# Altium PCB KAI.PcbDoc
Units mm, origin at the board's own origin, x right, y up, seen from the top; angles counter-clockwise.
Board outline 150 x 150 mm, 4 copper layers (DIGITAL, GROUND, POWER, ANALOG), stack 0.778 mm thick; 87 components, 81 nets, 475 pads, 14 vias.
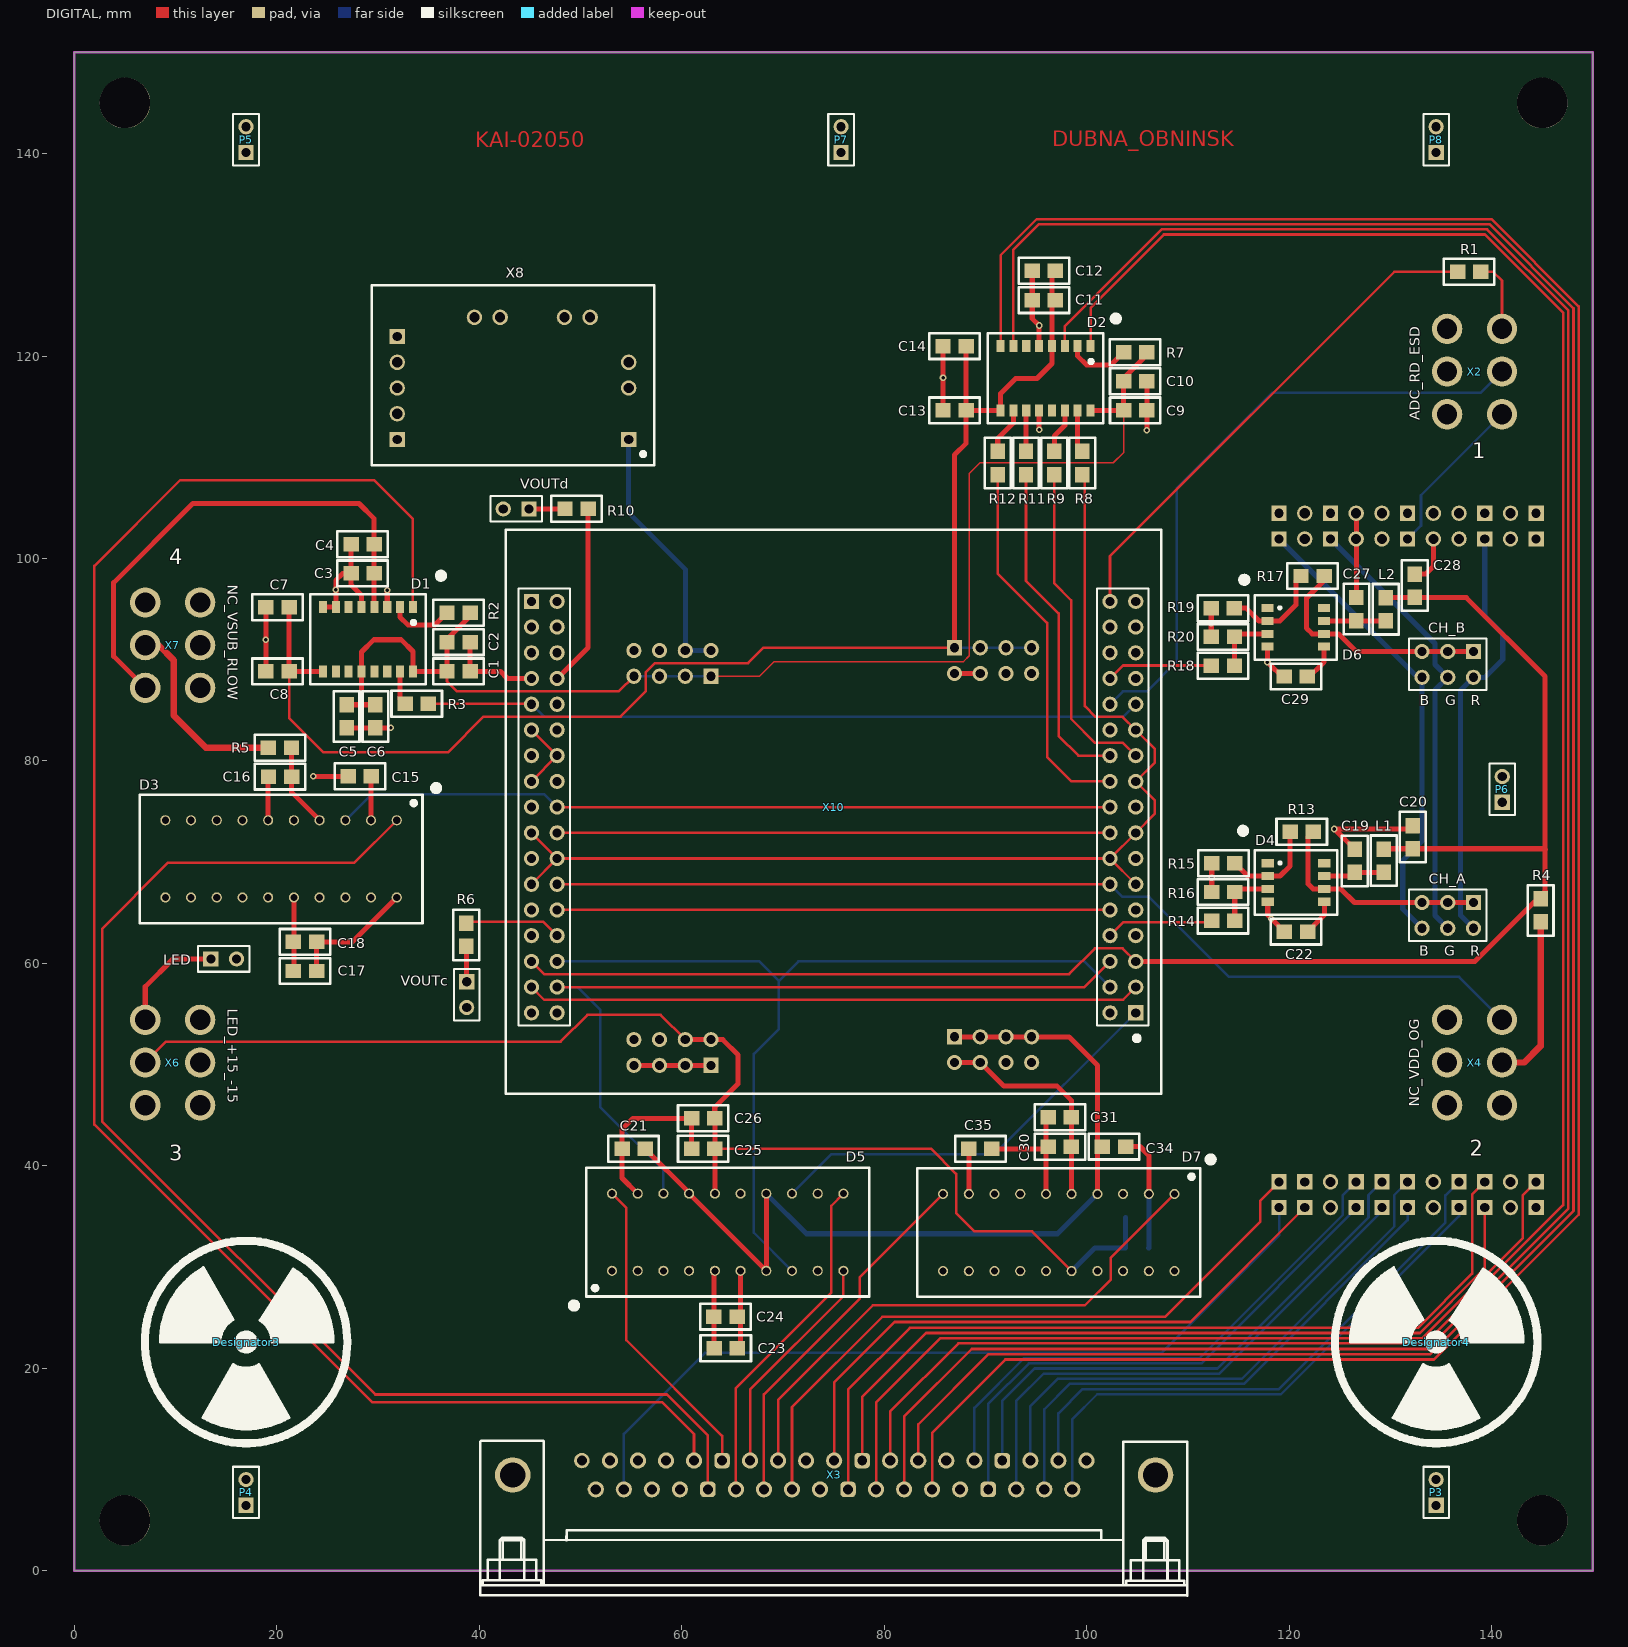
[diagram p0: DIGITAL view]
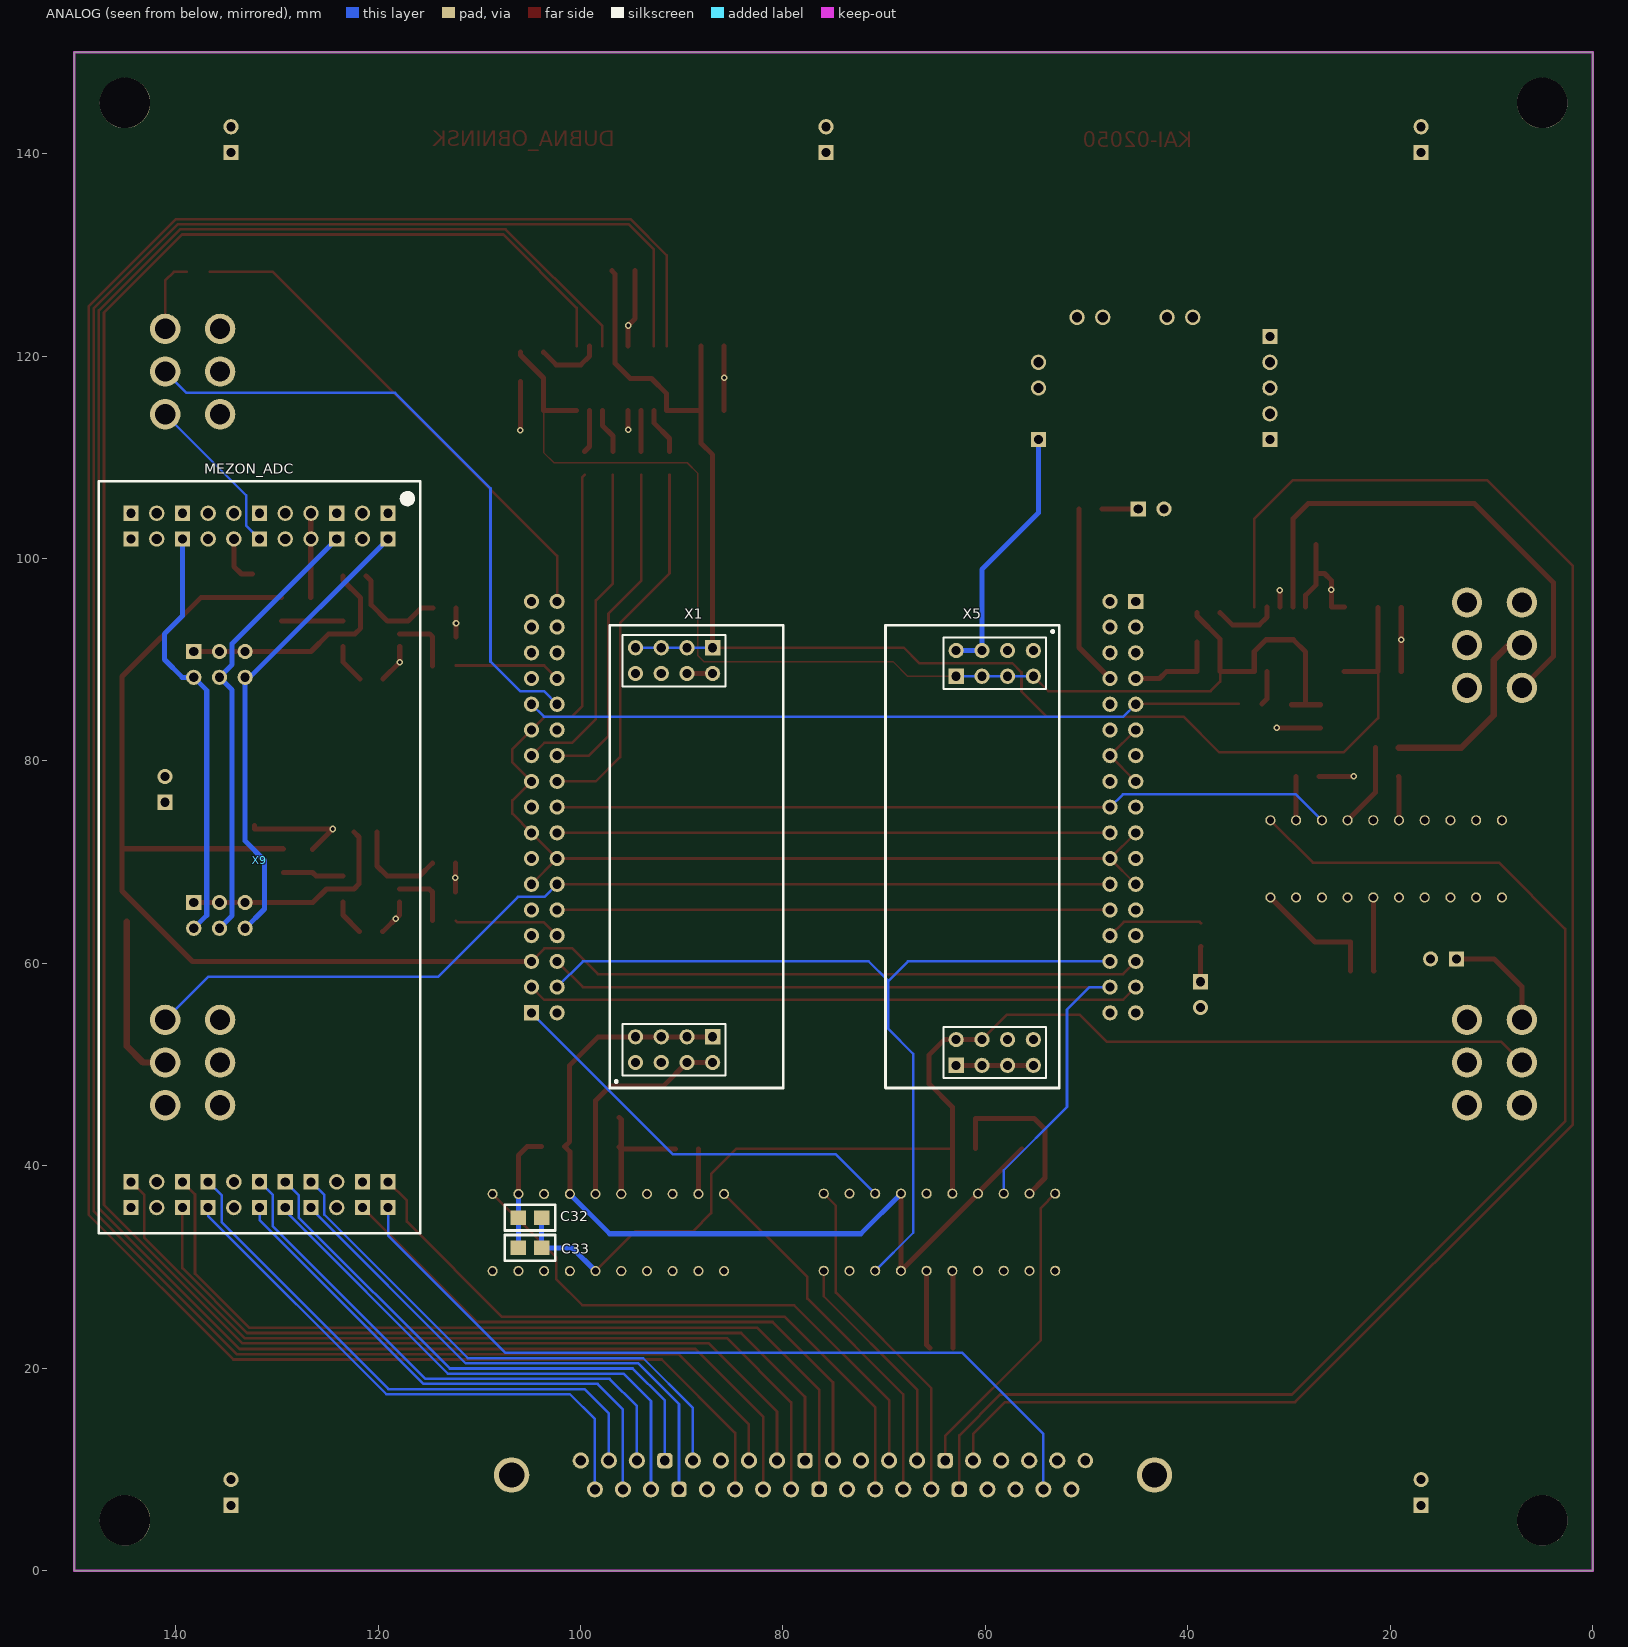
[diagram p1: ANALOG view, seen from below]
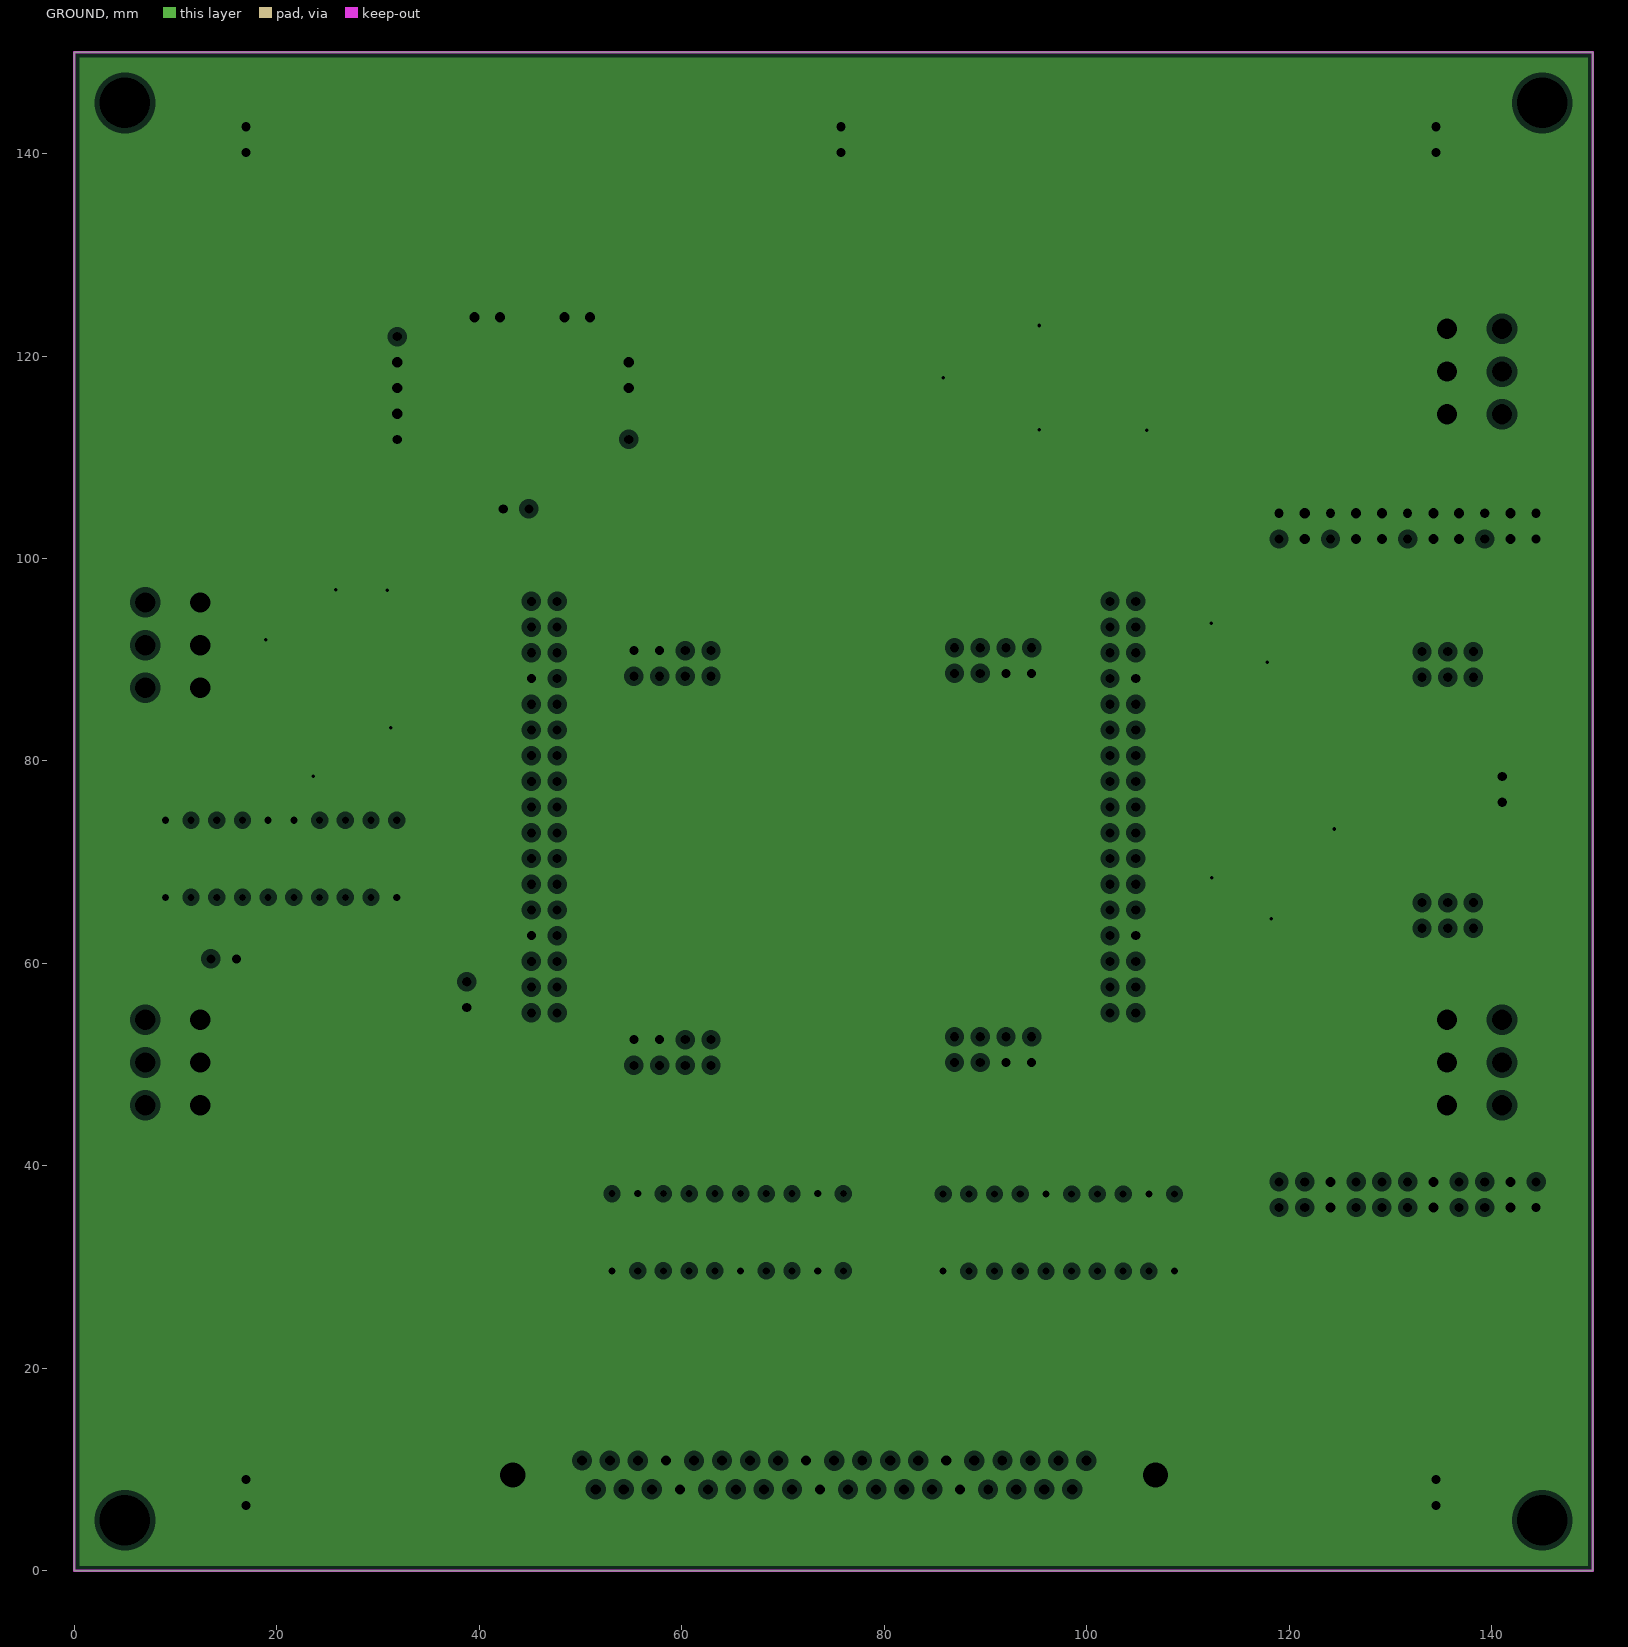
[diagram p2: GROUND, clearances drawn from the general rule]
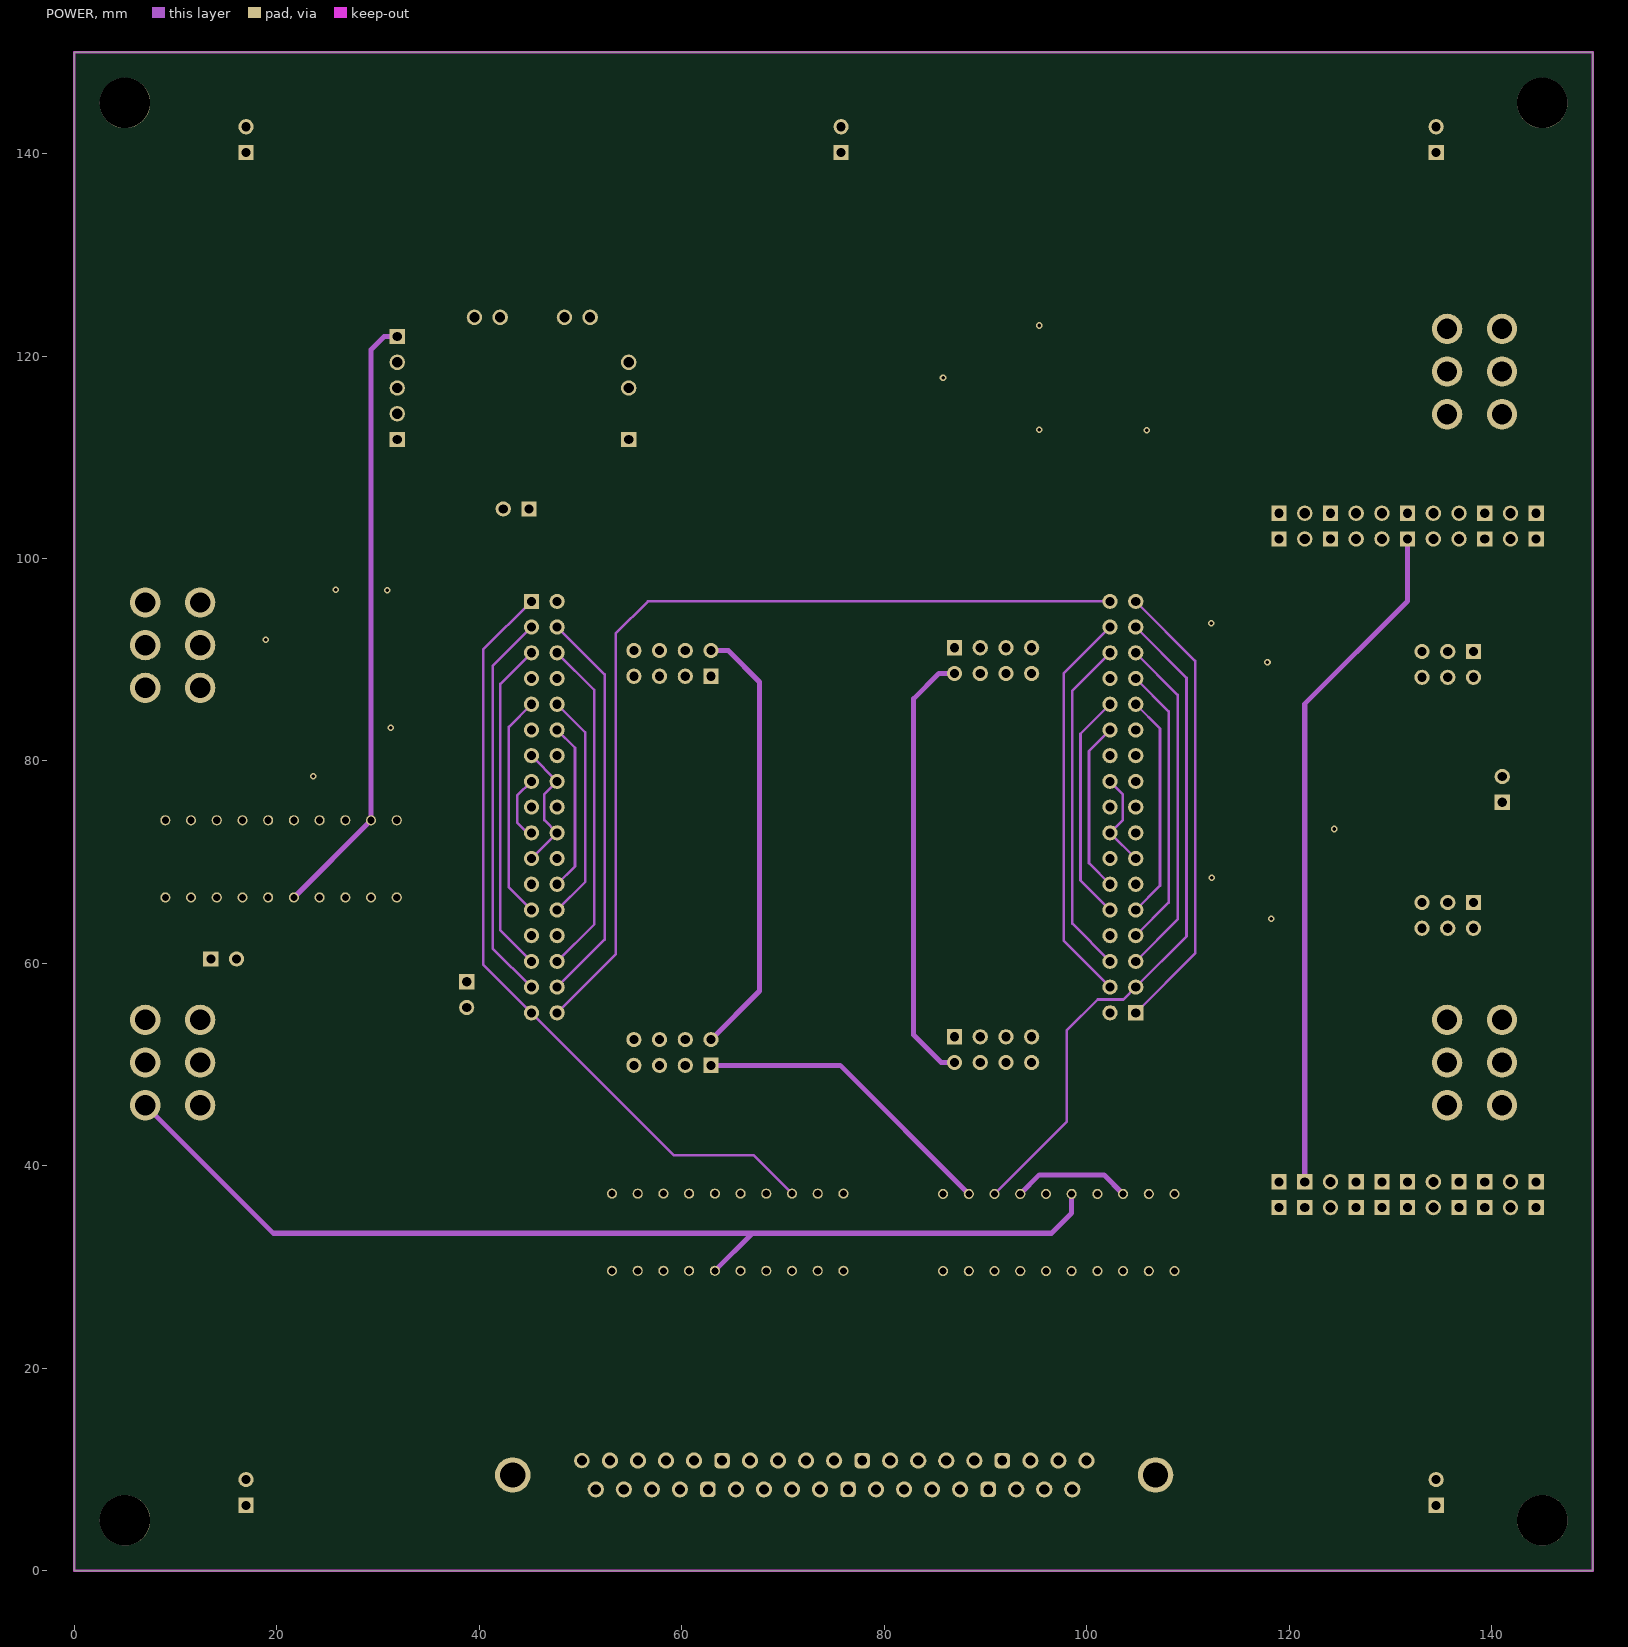
[diagram p3: POWER]

## Layer stack, top to bottom
Top Solder: solder mask 0.0102, Solder Resist, Dk 3.5
DIGITAL: signal copper 0.0356
Dielectric 1: core 0.254, FR-4, Dk 4.2
GROUND: plane copper 0.036, net GND
Dielectric 3: prepreg 0.127, Dk 4.2
POWER: signal copper 0.036
Dielectric 2: core 0.254, Dk 4.2
ANALOG: signal copper 0.0356
Bottom Solder: solder mask 0.0102, Solder Resist, Dk 3.5

## Board outline
0,0 150,0 150,150 0,150

## Design rules (kind name [scope] priority, off if disabled: settings)
Clearance [All] p1: gap=0.254
PlaneClearance [All] p1: clearance=0.508
PlaneConnect [All] p1: planeconnectstyle=Relief reliefexpansion=0.508 reliefentries=4 reliefconductorwidth=0.254 reliefairgap=0.254
PolygonConnect [All] p1: connectstyle=Relief reliefconductorwidth=0.254 reliefentries=4 polygonreliefangle="90 Angle" airgapwidth=0.254
RoutingVias [All] p1: holewidth=0.711 width=1.27 viastyle="Through Hole" minholewidth=0.711 minwidth=1.27 maxholewidth=0.711 maxwidth=1.27
SolderMaskExpansion [All] p1: expansion=0.102
Width [All] p1: maxlimit=1.254 minlimit=0.125 preferedwidth=0.254
27 further rules are at their usual default settings.

## Components (designator, comment, footprint, x,y, rotation, side; value= is the part's Value field where it differs from the comment)
C1 "0,01" CAP_SMALL 40.462,90.119 r180 top
C2 "0,1" CAP_SMALL 40.462,93.015 r180 top
C3 "0,01" CAP_SMALL 30.988,99.797 r180 top
C4 "0,1" CAP_SMALL 30.988,102.667 r180 top
C5 "0,01" CAP_SMALL 25.629,86.919 r270 top
C6 "0,1" CAP_SMALL 28.473,86.919 r270 top
C7 "0,01" CAP_SMALL 22.581,96.444 r180 top
C8 "0,1" CAP_SMALL 22.581,90.119 r180 top
C9 "0,01" CAP_SMALL 102.286,113.36 r0 top
C10 "0,1" CAP_SMALL 102.286,116.23 r0 top
C11 "0,01" CAP_SMALL 98.273,126.797 r180 top
C12 "0,1" CAP_SMALL 98.273,129.692 r180 top
C13 "0,01" CAP_SMALL 89.459,115.9 r180 top
C14 "0,1" CAP_SMALL 89.459,122.25 r180 top
C15 "0,1" CAP_SMALL 30.709,79.756 r180 top
C16 "0,1" CAP_SMALL 22.835,79.731 r180 top
C17 "0,01" CAP_SMALL 25.298,60.528 r180 top
C18 "0,1" CAP_SMALL 25.298,63.398 r180 top
C19 "0,1" CAP_SMALL 125.197,72.644 r270 top
C20 "1,0" CAP_SMALL 130.937,74.981 r270 top
C21 "0,1" CAP_SMALL 57.76,42.951 r180 top
C22 "10" CAP_SMALL 123.183,64.414 r180 top
C23 "0,1" CAP_SMALL 66.853,23.266 r180 top
C24 "0,01" CAP_SMALL 66.827,26.391 r180 top
C25 "0,1" CAP_SMALL 59.614,40.437 r0 top
C26 "0,01" CAP_SMALL 59.614,43.434 r0 top
C27 "0,1" CAP_SMALL 125.374,97.511 r270 top
C28 "1,0" CAP_SMALL 131.14,99.822 r270 top
C29 "10" CAP_SMALL 123.165,89.611 r180 top
C30 "0,1" CAP_SMALL 94.844,40.615 r0 top
C31 "0,01" CAP_SMALL 94.844,43.536 r0 top
C32 "0,1" CAP_SMALL 107.493,33.63 r180 bottom
C33 "0,01" CAP_SMALL 107.493,30.632 r180 bottom
C34 "0,1" CAP_SMALL 105.207,43.18 r180 top
C35 "0,1" CAP_SMALL 91.999,42.951 r180 top
CH_A "Header 3X2" HDR2X3 138.201,66.015 r180 top (schematic designator P1)
CH_B "Header 3X2" HDR2X3 138.201,90.805 r180 top (schematic designator P2)
D1 "EL7457" EL7457 33.452,95.199 r180 top
D2 "EL7457" EL7457 100.381,120.98 r180 top
D3 "MAX333A" MAX333A 31.852,74.143 r180 top
D4 "AD8021" AD8021 117.881,69.901 r270 top
D5 "MAX333A" MAX333A 53.111,29.642 r0 top
D6 "AD8021" AD8021 117.856,95.098 r270 top
D7 "MAX333A" MAX333A 108.675,37.234 r180 top
Designator3 "Comment" RADIATION 16.967,22.606 r0 top
Designator4 "Comment" RADIATION 134.518,22.606 r0 top
L1 "L" RES 128.092,67.666 r0 top
L2 "L" RES 128.295,92.507 r0 top
LED "Header 2" HDR1X2 13.487,60.452 r0 top
P3 "" HDR1X2 134.518,6.477 r90 top
P4 "" HDR1X2 16.967,6.477 r90 top
P5 "" HDR1X2 16.967,140.106 r90 top
P6 "" HDR1X2 141.046,75.921 r90 top
P7 "" HDR1X2 75.743,140.106 r90 top
P8 "" HDR1X2 134.518,140.106 r90 top
R1 "10k" RES 140.259,127.076 r90 top
R2 "10k" RES 40.437,93.396 r90 top
R3 "10" RES 31.344,86.893 r270 top
R4 "10k" RES 143.586,62.763 r0 top
R5 "10k" RES 17.831,82.55 r270 top
R6 "10k" RES 39.954,65.303 r180 top
R7 "10k" RES 107.264,119.126 r90 top
R8 "5" RES 100.813,111.912 r180 top
R9 "5" RES 98.044,111.912 r180 top
R10 "10k" RES 52.095,103.657 r90 top
R11 "5" RES 95.25,111.912 r180 top
R12 "5" RES 92.456,111.912 r180 top
R13 "1,5k" RES 123.723,71.755 r90 top
R14 "1,5k" RES 110.998,65.481 r270 top
R15 "1,5k" RES 115.976,68.656 r90 top
R16 "1,5k" RES 110.998,68.301 r270 top
R17 "1,5k" RES 124.79,97.028 r90 top
R18 "1,5k" RES 110.973,90.653 r270 top
R19 "1,5k" RES 115.926,93.853 r90 top
R20 "1,5k" RES 110.973,93.497 r270 top
VOUTc "Header 2" HDR1X2 38.76,58.191 r270 top
VOUTd "Header 2" HDR1X2 44.907,104.902 r180 top
X1 "M_NEGATIVE" MEZON_POWER_NEGATIVE 94.564,50.216 r90 bottom
X2 "ADC_RD_ESD" POWER 133.401,118.466 r270 top
X3 "CHEAP_CON_37_FEMALE" CHEAP_CONN_FEMALE 106.805,9.474 r180 top
X4 "NC_VDD_OG" POWER 133.401,50.216 r270 top
X5 "MEZ_POWER" MEZON_POWER_NEW 55.27,90.907 r270 bottom
X6 "LED_+15_-15" POWER 14.63,50.216 r90 top
X7 "NC_VSUB_RLOW" POWER 14.63,91.44 r90 top
X8 "+29V" MEZON_STEP-UP 54.762,111.76 r180 top
X9 "MEZON_ADC" MEZON_ADC 118.999,104.47 r270 bottom
X10 "KAI_02050_MEZ" KAI_02050_MEZONIN 104.845,55.125 r0 top

## Footprints (in the part's own frame and the unit in brackets; to place one, negate y for a bottom-side part, rotate by r counter-clockwise, add the part's x,y. Pads: shape width x height; smd on the part's side, far side on the other; paste and mask are expansions set on the pad)
AD8021 [mm]
  rect 0.8x1.2 smd: 1(0,0) 2(1.27,0) 3(2.54,0) 4(3.81,0) 5(3.81,5.588) 6(2.54,5.588) 7(1.27,5.588) 8(0,5.588)
  silkscreen extent -1.27,-1.27 5.08,6.86
CAP_SMALL [mil] "FROM_MAX"
  rect 60x55.98 smd: 1(53.71,50) 2(143.71,50)
  silkscreen extent 1,0 197,100, body extent 20,18 178,82, height 100
CHEAP_CONN_FEMALE [mm] "CHEAP_CONN_FEMALE"
  round 1.6 hole 1: 1(6.833,-1.422) 2(9.601,-1.422) 3(12.37,-1.422) 5(17.907,-1.422) 6(20.676,-1.422) 7(23.444,-1.422) 8(26.213,-1.422) 10(31.75,-1.422) 11(34.519,-1.422) 12(37.287,-1.422) 13(40.056,-1.422) 15(45.593,-1.422) 16(48.362,-1.422) 17(51.13,-1.422) 18(53.899,-1.422) 20(8.23,1.422) 21(10.998,1.422) 22(13.767,1.422) 24(19.304,1.422) 25(22.073,1.422) 26(24.841,1.422) 27(27.61,1.422) 29(33.147,1.422) 30(35.916,1.422) 31(38.684,1.422) 32(41.453,1.422) 34(46.99,1.422) 35(49.759,1.422) 36(52.527,1.422) 37(55.296,1.422)
  rrect50% 1.524x1.524 hole 0.965: 4(15.138,-1.422) 9(28.981,-1.422) 14(42.824,-1.422) 23(16.535,1.422) 28(30.378,1.422) 33(44.221,1.422)
  round 1.524 hole 0.965: 19(56.667,-1.422)
  round 3.5 hole 2.5: 38(0,0) 39(63.5,0)
  silkscreen extent -3.11,-3.36 66.72,11.92
EL7457 [mm]
  rect 0.8x1.2 smd: 1(0,0) 2(1.27,0) 3(2.54,0) 4(3.81,0) 5(5.08,0) 6(6.35,0) 7(7.62,0) 8(8.89,0) 9(8.89,6.35) 10(7.62,6.35) 11(6.35,6.35) 12(5.08,6.35) 13(3.81,6.35) 14(2.54,6.35) 15(1.27,6.35) 16(0,6.35)
  silkscreen extent -1.27,-1.27 10.16,7.62
HDR1X2 [mm] "Connector; Header; 2 Position"
  rect 1.5x1.5 hole 0.9: 1(0,0)
  round 1.5 hole 0.9: 2(2.54,0)
  silkscreen extent -1.27,-1.27 3.81,1.27
HDR2X3 [mm] "Connector; Header; 3x2 Position"
  rect 1.5x1.5 hole 0.9: 1(0,0)
  round 1.5 hole 0.9: 2(0,2.54) 3(2.54,0) 4(2.54,2.54) 5(5.08,0) 6(5.08,2.54)
  silkscreen extent -1.27,-1.27 6.35,3.81
KAI_02050_MEZONIN [mm]
  rect 1.5x1.5 hole 0.9: 1(0,0) 35(-59.69,40.64)
  round 1.5 hole 0.9: 2(-2.54,0) 3(0,2.54) 4(-2.54,2.54) 5(0,5.08) 6(-2.54,5.08) 7(0,7.62) 8(-2.54,7.62) 9(0,10.16) 10(-2.54,10.16) 11(0,12.7) 12(-2.54,12.7) 13(0,15.24) 14(-2.54,15.24) 15(0,17.78) 16(-2.54,17.78) 17(0,20.32) 18(-2.54,20.32) 19(0,22.86) 20(-2.54,22.86) 21(0,25.4) 22(-2.54,25.4) 23(0,27.94) 24(-2.54,27.94) 25(0,30.48) 26(-2.54,30.48) 27(0,33.02) 28(-2.54,33.02) 29(0,35.56) 30(-2.54,35.56) 31(0,38.1) 32(-2.54,38.1) 33(0,40.64) 34(-2.54,40.64) 36(-57.15,40.64) 37(-59.69,38.1) 38(-57.15,38.1) 39(-59.69,35.56) 40(-57.15,35.56) 41(-59.69,33.02) 42(-57.15,33.02) 43(-59.69,30.48) 44(-57.15,30.48) 45(-59.69,27.94) 46(-57.15,27.94) 47(-59.69,25.4) 48(-57.15,25.4) 49(-59.69,22.86) 50(-57.15,22.86) 51(-59.69,20.32) 52(-57.15,20.32) 53(-59.69,17.78) 54(-57.15,17.78) 55(-59.69,15.24) 56(-57.15,15.24) 57(-59.69,12.7) 58(-57.15,12.7) 59(-59.69,10.16) 60(-57.15,10.16) 61(-59.69,7.62) 62(-57.15,7.62) 63(-59.69,5.08) 64(-57.15,5.08) 65(-59.69,2.54) 66(-57.15,2.54) 67(-59.69,0) 68(-57.15,0)
  silkscreen extent -62.23,-7.98 2.54,47.73
MAX333A [mm]
  round 1 hole 0.7: 1(0,0) 2(2.54,0) 3(5.08,0) 4(7.62,0) 5(10.16,0) 6(12.7,0) 7(15.24,0) 8(17.78,0) 9(20.32,0) 10(22.86,0) 11(22.86,7.62) 12(20.32,7.62) 13(17.78,7.62) 14(15.24,7.62) 15(12.7,7.62) 16(10.16,7.62) 17(7.62,7.62) 18(5.08,7.62) 19(2.54,7.62) 20(0,7.62)
  silkscreen extent -2.54,-2.54 25.4,10.16
MEZON_ADC [mm] "MEZON_ADC"
  rect 1.5x1.5 hole 0.9: 1(0,0) 2(2.54,0) 5(0,-5.08) 6(2.54,-5.08) 11(0,-12.7) 12(2.54,-12.7) 17(0,-20.32) 18(2.54,-20.32) 21(0,-25.4) 22(2.54,-25.4) 23(66.04,-25.4) 24(68.58,-25.4) 27(66.04,-20.32) 28(68.58,-20.32) 29(66.04,-17.78) 30(68.58,-17.78) 33(66.04,-12.7) 34(68.58,-12.7) 35(66.04,-10.16) 36(68.58,-10.16) 37(66.04,-7.62) 38(68.58,-7.62) 41(66.04,-2.54) 42(68.58,-2.54) 43(66.04,0) 44(68.58,0)
  round 1.524 hole 1: 3(0,-2.54) 4(2.54,-2.54) 7(0,-7.62) 8(2.54,-7.62) 9(0,-10.16) 10(2.54,-10.16) 13(0,-15.24) 14(2.54,-15.24) 15(0,-17.78) 16(2.54,-17.78) 19(0,-22.86) 20(2.54,-22.86) 25(66.04,-22.86) 26(68.58,-22.86) 31(66.04,-15.24) 32(68.58,-15.24) 39(66.04,-5.08) 40(68.58,-5.08)
  silkscreen extent -3.18,-28.58 71.12,3.18
MEZON_POWER_NEGATIVE [mm]
  round 1.5 hole 0.9: 1(0,-2.54) 1(0,0) 2(0,-7.62) 2(0,-5.08) 3(2.54,-5.08) 3(2.54,-2.54) 3(2.54,0) 4(38.43,-2.54) 4(38.43,0) 5(38.43,-7.62) 5(38.43,-5.08) 6(40.97,0) 6(40.97,-5.08) 6(40.97,-2.54)
  rect 1.5x1.5 hole 0.9: 3(2.54,-7.62) 6(40.97,-7.62)
  silkscreen extent -2.51,-14.61 43.21,2.54
MEZON_POWER_NEW [mm]
  round 1.5 hole 0.9: 1(0,-2.54) 1(0,0) 2(0,-7.62) 2(0,-5.08) 3(2.54,-5.08) 3(2.54,-2.54) 3(2.54,0) 4(38.43,-2.54) 4(38.43,0) 5(38.43,-7.62) 5(38.43,-5.08) 6(40.97,0) 6(40.97,-5.08) 6(40.97,-2.54)
  rect 1.5x1.5 hole 0.9: 3(2.54,-7.62) 6(40.97,-7.62)
  silkscreen extent -2.51,-14.61 43.21,2.54
MEZON_STEP-UP [mm] "MEZON_STEP-UP"
  rect 1.5x1.5 hole 0.9: 1(0,0) 8(22.86,-10.16) 12(22.86,0)
  round 1.524 hole 1: 2(0,-5.08) 3(0,-7.62) 4(3.81,-12.065) 5(6.35,-12.065) 6(12.7,-12.065) 7(15.24,-12.065) 9(22.86,-7.62) 10(22.86,-5.08) 11(22.86,-2.54)
  silkscreen extent -2.54,-15.24 25.4,2.54
POWER [mm] "POWER"
  round 3 hole 2: 1(4.217,7.62) 2(0,7.62) 3(-4.217,7.62) 4(4.217,2.198) 5(0,2.198) 6(-4.217,2.198)
RADIATION [mm]
  silkscreen extent -10,-10 10,10
RES [mil] "FROM_MAX"
  rect 55.98x60 smd: 1(49,52.71) 2(49,142.71)
  silkscreen extent -1,0 99,196, body extent 17,19 81,177, height 100

## Part data
C1 C2 C3 C4 C5 C6 C7 C8 C9 C10 C11 C12 C13 C14 C15 C16 C17 C18 C19 C20 C21 C22 C23 C24 C25 C26 C27 C28 C29 C30 C31 C32 C33 C34 C35: library part CAP_SMALL
CH_A CH_B: "Header, 3-Pin, Dual row"
L1 L2 R1 R2 R3 R4 R5 R6 R7 R8 R9 R10 R11 R12 R13 R14 R15 R16 R17 R18 R19 R20: library part RES
LED VOUTc VOUTd: "Header, 2-Pin"
P3 P4 P5 P6 P7 P8: library part "Header 2", "Header, 2-Pin"
X1: library part MEZON_POWER_NEGATIVE
X2 X4 X6 X7: library part POWER
X5: library part MEZON_POWER_NEW
X8: library part MEZON_STEP-UP
X10: library part KAI_02050_MEZON

## Free pads (board coordinates)
  round 5 hole 5 unplated: H(5,5) H(5,145) H(145,5) H(145,145)

## Via types
v1: diameter 0.65, hole 0.35, DIGITAL to ANALOG, 14 vias

## Nets (pads, with @x,y where several pads share a name; then routed paths per layer and width w, separated by ;. In a path a pad name is that pad's centre, name@x,y a point inside that pad or via, vN(x,y) a via of type N, cw(c..) or ccw(c..) an arc to the next point about the centre after c; other vN are vias at no path point)
ADC_POW: X2.1 X9.12 X9.41 | length 83.9
  POWER w0.5: X9.41 121.539,85.649 131.699,95.809 X9.12
  ANALOG w0.254: X9.12 133.02,103.251 133.02,106.247 X2.1
ADCCLK: X3.28 X9.27 | length 85.8
  DIGITAL w0.254: X3.28 76.427,17.905 82.525,24.003 132.708,24.003 138.074,29.37 138.074,37.186 X9.27
CDSCLK1: X3.27 X9.23 | length 85.3
  DIGITAL w0.254: X3.27 79.196,16.635 85.547,22.987 133.172,22.987 143.078,32.893 143.078,37.109 X9.23
CDSCLK2: X3.9 X9.28 | length 79
  DIGITAL w0.254: X3.9 77.824,17.194 84.125,23.495 132.918,23.495 139.319,29.896 X9.28
D0: X3.20 X9.30 | length 54.3
  ANALOG w0.254: X3.20 98.576,14.984 101.041,17.45 119.184,17.45 136.779,35.045 X9.30
D1: X3.2 X9.29 | length 55.3
  ANALOG w0.254: X3.2 97.204,15.569 99.593,17.958 118.974,17.958 135.433,34.417 135.433,37.084 X9.29
D2: X3.21 X9.34 | length 52.8
  ANALOG w0.254: X3.21 95.807,15.95 98.323,18.466 115.526,18.466 131.699,34.638 X9.34
D3: X3.3 X9.33 | length 53.6
  ANALOG w0.254: X3.3 94.436,16.28 97.13,18.974 115.316,18.974 130.378,34.036 130.378,37.109 X9.33
D4: X3.22 X9.36 | length 53
  ANALOG w0.254: X3.22 93.039,16.762 95.758,19.482 113.113,19.482 129.159,35.527 X9.36
D5: X3.4 X9.35 | length 53.6
  ANALOG w0.254: X3.4 91.667,16.813 94.844,19.99 112.903,19.99 127.838,34.925 127.838,37.109 X9.35
D6: X3.23 X9.38 | length 52.9
  ANALOG w0.254: X3.23 90.27,16.483 94.285,20.498 111.335,20.498 126.619,35.781 X9.38
D7: X3.5 X9.37 | length 53.3
  ANALOG w0.254: X3.5 88.898,16.102 93.802,21.006 111.125,21.006 125.298,35.179 125.298,37.109 X9.37
ESD: R1.2 X10.34 X10.68 | length 140.4
  DIGITAL w0.254: X10.34 102.305,100.248 130.378,128.321 R1.2
  POWER w0.254: X10.68 53.467,60.897 53.467,92.583 56.649,95.765 X10.34
GND: C1.1 C2.1 C3.2 C4.2 C5.2 C6.2 C7.2 C8.2 C9.2 C10.2 C11.2 C12.2 C13.2 C14.2 C15.2 C16.2 C17.1 C18.1 C19.1 C20.1 C21.2 C22.2 C23.1 C24.1 C25.1 C26.1 C27.1 C28.1 C29.2 C30.1 C31.1 C32.1 C33.1 C34.1 C35.1 D1.3 D1.5 D1.7 D1.8 D2.5 D2.12 D3.5 D3.6 D3.10 D3.11 D3.20 D4.4 D5.1 D5.6 D5.9 D5.12 D5.19 D6.4 D7.2 D7.6 D7.11 D7.20 LED.2 P3.1 P3.2 P4.1 P4.2 P5.1 P5.2 P6.1 P6.2 P7.1 P7.2 P8.1 P8.2 R15.2 R16.1 R19.2 R20.1 VOUTc.2 VOUTd.2 X1.1 X1.4 X2.4 X2.5 X2.6 X3.6 X3.11 X3.16 X3.24 X3.29 X3.34 X3.38 X3.39 X4.4 X4.5 X4.6 X5.1 X5.4 X6.4 X6.5 X6.6 X7.4 X7.5 X7.6 X8.2 X8.3 X8.4 X8.5 X8.6 X8.7 X8.9 X8.10 X8.11 X8.12 X9.1 X9.3 X9.4 X9.5 X9.7 X9.8 X9.9 X9.10 X9.11 X9.13 X9.14 X9.15 X9.16 X9.17 X9.19 X9.20 X9.21 X9.22 X9.24 X9.25 X9.26 X9.31 X9.32 X9.39 X9.40 X10.7 X10.27 X10.41 X10.61 | length 190.5
  DIGITAL w0.5: C8.2 C7.2 ; D3.6 19.152,78.428 C16.2 ; v1(23.622,78.486) C15.2 ; C17.1 C18.1 27.457,62.128 D3.20 ; D1.8 D1.7 v1(25.832,96.901) 25.832,97.841 26.518,98.527 C3.2 ; C5.2 C6.2 31.235,83.269 v1(31.242,83.261) ; C4.2 C3.2 ; D1.5 28.372,96.368 27.338,97.402 C3.2 ; D1.3 v1(30.912,96.876) ; C2.1 C1.1 42.094,88.849 42.799,88.145 X10.41 ; D5.19 54.109,38.804 C21.2 54.109,43.619 55.194,44.704 C26.1 C25.1 ; C23.1 65.811,22.319 D5.6 ; C13.2 C14.2 ; C35.1 C30.1@95.975,41.681 ; C12.2 C11.2 94.622,123.691 v1(95.301,123.012) D2.5 ; v1(95.301,112.7) D2.12 ; D7.6 C30.1@95.975,41.681 ; C30.1@95.975,41.885 95.975,44.573 C31.1 ; C30.1 96.005,41.681 C30.1@95.975,41.681 ; C34.1 105.258,41.91 106.135,41.032 D7.2 ; C10.2 C9.2 105.936,112.682 v1(105.943,112.674) ; R19.2 112.301,92.263 R20.1 ; R16.1 112.352,67.071 R15.2 ; D6.4 v1(117.856,89.764) C29.2@119.507,88.113 ; D4.4 117.881,64.795 C22.2 ; C19.1 124.467,73.279 v1(124.46,73.279) 132.207,73.279 C20.1 ; X9.7 126.644,104.445 C27.1 ; C28.1 133.484,98.458 134.239,99.212 X9.14
  POWER w0.254: X10.7 108.102,66.002 108.102,84.887 X10.27
  ANALOG w0.5: C33.1 106.135,31.909 D7.2
  other v1: 118.237,64.414 112.352,68.453 18.93,91.973 112.293,93.624 85.809,117.856
H1BA: R12.2 X10.13 X10.16 X10.20 X10.47 X10.50 X10.54 X10.55 | length 114.8
  DIGITAL w0.254: X10.54 X10.16 ; R12.2 91.211,98.527 96.088,93.65 96.088,80.391 98.495,77.985 X10.20
  POWER w0.254: X10.55 X10.54 46.431,74.168 46.431,76.721 X10.50 X10.47 ; X10.20 103.581,76.708 103.581,74.181 X10.16 X10.13
H1BB: R9.2 X10.21 | length 32.7
  DIGITAL w0.254: R9.2 96.799,97.536 98.476,95.86 98.476,84.15 100.838,81.788 103.582,81.788 X10.21
H1BB_F: D2.3 X3.26 | length 229
  DIGITAL w0.254: X3.26 81.964,15.238 88.646,21.92 133.68,21.92 147.574,35.814 147.574,124.493 139.555,132.512 107.409,132.512 97.841,122.943 D2.3
H2BA: R8.2 X10.11 X10.14 X10.15 X10.19 X10.23 X10.45 X10.48 X10.49 X10.53 X10.56 X10.57 | length 124.9
  DIGITAL w0.254: X10.57 X10.56 ; X10.53 X10.56 ; X10.49 X10.48 X10.45 ; R8.2 99.822,108.034 99.822,85.42 100.889,84.353 103.556,84.353 X10.23 106.731,81.179 106.731,79.87 X10.19 106.731,76.099 106.731,74.79 X10.15 X10.14 ; X10.11 X10.14 ; X10.56 X10.14
  POWER w0.254: X10.53 44.748,72.905 43.739,73.914 43.739,76.568 X10.49
H2BB: R11.2 X10.22 | length 33
  DIGITAL w0.254: R11.2 94.005,97.79 97.231,94.564 97.231,82.474 99.18,80.525 X10.22
H2BB_F: D2.7 X3.7 | length 235.5
  DIGITAL w0.254: X3.7 83.361,14.476 90.272,21.387 133.909,21.387 148.082,35.56 148.082,124.703 139.765,133.02 95.275,133.02 92.761,130.505 D2.7
H_LOW(-5): C7.1 C8.1 C11.1 C12.1 C13.1 C14.1 D1.9 D2.4 D2.9 X1.6 | length 145.4
  DIGITAL w0.254: C8.1 21.216,84.244 24.613,80.848 36.906,80.848 40.437,84.379 53.95,84.379 56.439,86.868 56.439,88.748 57.353,89.662 66.548,89.662 68.072,91.186 X1.6@86.944,91.186
  DIGITAL w0.5: C7.1 C8.1 D1.9 ; X1.6@86.944,91.186 86.944,110.236 88.095,111.386 C13.1 ; C14.1 C13.1 ; C12.1 96.571,128.085 D2.4 96.571,119.253 95.098,117.78 92.989,117.78 91.491,116.281 D2.9 C13.1
  ANALOG w0.254: X1.6@86.944,91.186 89.484,91.186 92.024,91.186 X1.6@94.564,91.186
LED: LED.1 X6.1 | length 10.9
  DIGITAL w0.508: X6.1 7.01,57.709 9.754,60.452 LED.1
NetC19_2: C19.2 D4.7 L1.1 | length 6
  DIGITAL w0.5: D4.7 126.104,68.631 C19.2 129.326,68.994 L1.1
NetC22_1: C22.1 D4.5 | length 3.6
  DIGITAL w0.5: C22.1 123.469,64.795 D4.5
NetC27_2: C27.2 D6.7 L2.1 | length 6.1
  DIGITAL w0.5: D6.7 129.522,93.828 L2.1
NetC29_1: C29.1 D6.5 | length 3.9
  DIGITAL w0.5: C29.1@121.793,88.113 123.444,89.764 D6.5
NetD1_2: D1.2 R2.2 | length 6.4
  DIGITAL w0.5: D1.2 32.182,94.209 32.944,93.447 35.618,93.447 R2.2
NetD1_15: D1.15 R3.1 | length 3.4
  DIGITAL w0.5: D1.15 32.182,86.149 R3.1
NetD2_2: D2.2 R7.2 | length 6.4
  DIGITAL w0.5: D2.2 99.111,119.99 99.974,119.126 102.395,119.126 R7.2
NetD2_10: D2.10 R12.1 | length 4.7
  DIGITAL w0.5: R12.1 91.211,111.862 92.761,113.411 D2.10
NetD2_11: D2.11 R11.1 | length 4.1
  DIGITAL w0.5: R11.1 94.005,114.605 D2.11
NetD2_14: D2.14 R9.1 | length 4.5
  DIGITAL w0.5: R9.1 96.799,112.09 97.841,113.132 D2.14
NetD2_15: D2.15 R8.1 | length 4.3
  DIGITAL w0.5: D2.15 99.111,111.056 R8.1@99.593,110.574
NetD4_2: D4.2 R13.2 R15.1 | length 9.8
  DIGITAL w0.5: R15.1 115.908,68.631 D4.2 119.101,68.631 120.099,69.629 R13.2
NetD4_3: D4.3 R14.2 R16.2 | length 6.2
  DIGITAL w0.5: R14.2 R16.2 114.928,67.361 D4.3
NetD4_6: CH_A.1 CH_A.3 CH_A.5 D4.6 R13.1 | length 22.7
  DIGITAL w0.5: R13.1 121.869,72.484 121.869,67.869 122.377,67.361 D4.6 125.095,67.361 126.441,66.015 133.35,66.015 135.89,66.015 CH_A.1@138.43,66.015
NetD6_2: D6.2 R17.2 R19.1 | length 10.3
  DIGITAL w0.5: R19.1 115.748,95.098 117.018,93.828 D6.2 119.075,93.828 120.675,95.428 120.675,97.783 R17.2
NetD6_3: D6.3 R18.2 R20.2 | length 6.2
  DIGITAL w0.5: R18.2 R20.2 114.902,92.558 D6.3
NetD6_6: CH_B.1 CH_B.3 CH_B.5 D6.6 R17.1 | length 23.4
  DIGITAL w0.5: R17.1 123.451,97.823 121.717,96.088 121.717,93.116 122.276,92.558 D6.6 124.866,92.558 126.619,90.805 CH_B.1 CH_B.1@138.227,90.83
NetD7_3: D7.3 D7.7 | length 11.7
  POWER w0.5: D7.7 95.317,39.116 101.713,39.116 D7.3
NetR1_1: R1.1 X2.3 | length 7.2
  DIGITAL w0.254: R1.1 140.157,128.321 141.021,127.457 X2.3
NetR4_1: R4.1 X4.2 | length 16.7
  DIGITAL w0.635: X4.2 143.205,50.216 144.831,51.841 R4.1
NetR5_1: R5.1 X7.2 | length 19.6
  DIGITAL w0.635: X7.2 8.331,91.44 9.804,89.967 9.804,84.506 13.005,81.305 R5.1
NetR6_2: R6.2 VOUTc.1 | length 3.5
  DIGITAL w0.5: R6.2 38.76,61.628 VOUTc.1
NetR10_2: R10.2 VOUTd.1 | length 3.6
  DIGITAL w0.5: VOUTd.1 R10.2@48.471,104.902
OG: X4.3 X10.12 X10.24 X10.46 X10.58 | length 132.5
  DIGITAL w0.254: X10.58 X10.12
  POWER w0.254: X10.58 49.454,69.583 49.454,81.306 X10.46 ; X10.12 100.228,69.901 100.228,80.988 X10.24
  ANALOG w0.254: X10.12 103.556,66.573 106.172,66.573 114.071,58.674 136.78,58.674 X4.3
P1B_1: D7.1 X3.12 | length 54.8
  DIGITAL w0.254: X3.12 69.518,16.864 78.892,26.238 99.822,26.238 102.387,28.804 102.387,30.946 D7.1
P1B_2: D7.10 X3.31 | length 36.5
  DIGITAL w0.254: X3.31 68.121,17.423 77.597,26.899 77.597,29.016 D7.10
P2B: D5.20 X3.14 | length 30.9
  DIGITAL w0.254: D5.20 54.534,35.839 54.534,22.784 63.981,13.337 X3.14
P3B: D5.11 X3.32 | length 33.6
  DIGITAL w0.254: X3.32 65.353,18.058 74.778,27.483 74.778,36.068 D5.11
P4B: D5.10 X3.13 | length 22.6
  DIGITAL w0.254: X3.13 66.75,17.905 75.971,27.127 D5.10
P5: D2.8 X3.25 | length 239.2
  DIGITAL w0.254: X3.25 84.733,13.638 91.973,20.879 134.29,20.879 148.59,35.179 148.59,124.913 139.976,133.528 95.065,133.528 91.491,129.954 D2.8
P6: D2.1 X3.8 | length 224.6
  DIGITAL w0.254: X3.8 80.593,15.746 87.325,22.479 133.401,22.479 147.066,36.144 147.066,124.282 139.344,132.004 107.62,132.004 100.381,124.765 D2.1
P7: D1.1 X3.15 | length 175
  DIGITAL w0.254: D1.1 33.452,103.911 29.616,107.747 10.465,107.747 1.981,99.263 1.981,44.094 29.413,16.662 58.064,16.662 61.212,13.514 X3.15
R: R3.2 X10.9 X10.25 X10.43 X10.59 | length 115.4
  DIGITAL w0.254: R3.2 45.111,85.649 X10.43
  POWER w0.254: X10.59 42.926,67.514 42.926,83.376 X10.43 ; X10.9 107.239,67.678 107.239,83.211 X10.25
  ANALOG w0.254: X10.43 46.381,84.379 103.619,84.379 X10.25
R_HIGH(+3V): C1.2 C2.2 C5.1 C6.1 C9.1 C10.1 D1.12 D1.16 D2.16 R2.1 R7.1 X5.3 | length 128.9
  DIGITAL w0.152: X5.3@62.89,88.367 67.691,88.367 69.139,89.814 87.833,89.814 88.404,90.385 88.404,108.394 89.459,109.449 102.616,109.449 103.65,110.483 C9.1
  DIGITAL w0.254: C1.2 36.812,87.851 37.77,86.893 53.797,86.893 X5.3@55.27,88.367
  DIGITAL w0.5: C5.1 28.473,85.555 ; C6.1 28.473,85.555 ; R2.1 39.098,94.318 36.812,92.032 C2.2 C1.2 D1.16 33.452,90.805 32.283,91.973 29.591,91.973 28.372,90.754 D1.12 28.372,85.656 28.473,85.555 ; D2.16 C9.1 C10.1 103.65,117.823 105.925,120.099 R7.1
  ANALOG w0.254: X5.3@55.27,88.367 57.81,88.367 60.35,88.367 X5.3@62.89,88.367
R_LOW(-2V): C3.1 C4.1 D1.4 X7.3 | length 50
  DIGITAL w0.5: X7.3 3.886,90.347 3.886,97.612 11.709,105.435 28.118,105.435 29.624,103.929 C4.1 C3.1 29.624,95.217 D1.4
RD: X2.2 X10.10 X10.26 X10.44 X10.60 | length 162.3
  DIGITAL w0.254: X10.60 X10.10
  POWER w0.254: X10.60 50.47,68.059 50.47,82.83 X10.44 ; X10.10 99.39,68.199 99.39,82.69 X10.26
  ANALOG w0.254: X10.26 103.569,86.868 105.943,86.868 108.89,89.814 108.89,106.934 118.313,116.357 138.913,116.357 X2.2
SCLK: X3.30 X9.43 | length 66.7
  DIGITAL w0.254: X3.30 70.89,16.178 79.807,25.095 107.747,25.095 117.145,34.493 117.145,36.576 X9.43
SDATA: X3.36 X9.44 | length 81.1
  ANALOG w0.254: X3.36 54.278,13.537 62.281,21.539 107.391,21.539 118.999,33.147 X9.44
SLOAD: X3.10 X9.42 | length 61.4
  DIGITAL w0.254: X3.10 75.055,18.617 81.026,24.587 110.236,24.587 X9.42
STAB+15: C25.2 C26.2 C32.2 C33.2 D5.16 D7.16 X5.2 X5.5 X6.2 X8.1 | length 197.7
  DIGITAL w0.254: X6.2 9.068,52.273 48.031,52.273 50.673,54.915 57.912,54.915 X5.5@60.35,52.476 ; C25.2 63.271,41.707 84.607,41.707 87.097,39.218 87.097,35.331 88.9,33.528 94.601,33.528 D7.16
  DIGITAL w0.5: X5.5@60.35,52.476 62.89,52.476 64.059,52.476 65.565,50.97 65.565,48.108 63.264,45.807 C26.2 63.271,44.697 63.271,41.707 D5.16
  POWER w0.5: X5.5@62.89,52.476 67.691,57.277 67.691,87.808 64.592,90.907 X5.2@62.89,90.907
  ANALOG w0.5: X8.1 54.762,104.521 60.35,98.933 60.35,90.907 X5.2@62.89,90.907 ; D7.16 100.804,31.902 C33.2 C32.2
STAB-15: C23.2 C24.2 C30.2 C31.2 D5.5 D7.5 X1.2 X1.5 X6.3 | length 180.7
  DIGITAL w0.5: C23.2 63.203,29.573 D5.5 ; X1.2@86.944,50.216 89.484,50.216 91.821,47.879 97.079,47.879 98.515,46.443 D7.5 ; X1.5@86.944,88.646 X1.5@89.484,88.646
  POWER w0.5: X6.3 19.659,33.35 66.98,33.35 ; D5.5 66.98,33.35 ; X1.2@86.944,50.216 85.623,50.216 82.906,52.934 82.906,86.157 85.395,88.646 X1.5@86.944,88.646 ; D7.5 98.515,35.345 96.52,33.35 66.98,33.35
SUB: D3.3 X10.18 X10.52 | length 77.1
  DIGITAL w0.254: X10.52 X10.18
  ANALOG w0.254: D3.3 29.337,76.708 46.432,76.708 X10.52
SUB_FPGA: D3.1 X3.33 | length 130.6
  DIGITAL w0.254: D3.1 27.661,69.952 9.271,69.952 2.743,63.424 2.743,44.41 29.729,17.424 58.547,17.424 62.584,13.387 X3.33
V1T: D7.8 X10.3 X10.31 X10.37 X10.65 | length 166.9
  DIGITAL w0.254: X10.65 46.406,56.413 103.594,56.413 X10.3
  POWER w0.254: X10.65 41.326,61.494 41.326,89.395 X10.37 ; D7.8 98.019,44.357 98.019,53.365 101.092,56.439 103.619,56.439 X10.3 109.855,62.674 109.855,88.215 X10.31
V2T: D5.8 X10.4 X10.32 X10.40 X10.64 | length 161.3
  POWER w0.254: X10.64 51.359,63.868 51.359,87.021 X10.40 ; X10.4 97.714,62.256 97.714,88.633 X10.32
  ANALOG w0.254: X10.64 67.666,60.205 69.596,58.274 ; D5.8 67.132,33.401 67.132,51.079 69.596,53.543 69.596,58.274 ; X10.4 99.765,60.205 71.526,60.205 69.596,58.274
V3T: D5.13 X10.1 X10.33 X10.35 X10.67 | length 164.6
  POWER w0.254: X10.35 40.386,90.996 40.386,59.894 X10.67 59.208,41.072 67.081,41.072 D5.13 ; X10.1 110.719,60.998 110.719,89.891 X10.33
  ANALOG w0.254: D5.13 74.803,41.173 90.894,41.173 X10.1
V4T: D5.18 X10.6 X10.30 X10.38 X10.66 | length 154.6
  DIGITAL w0.254: X10.66 99.765,57.665 X10.6
  POWER w0.254: X10.66 52.375,62.344 52.375,88.545 X10.38 ; X10.6 98.577,63.932 98.577,86.957 X10.30
  ANALOG w0.254: X10.66 49.727,57.665 51.943,55.448 51.943,45.822 58.191,39.573 D5.18
V_LOW(-8): C21.1 C34.2 D5.7 D5.14 D5.17 D7.4 X1.3 | length 89
  DIGITAL w0.5: C21.1 60.731,37.345 D5.17 D5.7 D5.14 ; X1.3@86.944,52.756 89.484,52.756 92.024,52.756 94.564,52.756 98.247,52.756 101.067,49.936 101.067,42.4 C34.2 101.055,41.409 D7.4
  ANALOG w0.5: D5.14 72.314,33.299 97.121,33.299 D7.4
V_THIRD_L(+12): C35.2 D7.9 X5.6 | length 42.8
  DIGITAL w0.5: X5.6@55.27,49.936 X5.6@62.89,49.936 ; C35.2 88.355,41.675 D7.9
  POWER w0.5: X5.6@62.89,49.936 75.653,49.936 D7.9
VDD: C20.2 C28.2 L1.2 L2.2 R4.2 X10.5 X10.29 X10.39 X10.63 | length 228.2
  DIGITAL w0.254: X10.63 46.406,58.953 98.273,58.953 100.813,61.493 103.556,61.493 X10.5
  DIGITAL w0.5: 137.498,96.132 145.288,88.341 145.288,71.247 145.288,67.158
  DIGITAL w0.508: X10.5 138.335,60.205 145.288,67.158 ; L1.2 129.377,71.331 C20.2 145.204,71.331 145.288,71.247 ; L2.2 137.498,96.132
  POWER w0.254: X10.63 42.088,63.272 42.088,87.617 X10.39 ; X10.5 108.991,64.351 108.991,86.538 X10.29
VES(+29): C15.1 C17.2 C18.2 D3.2 D3.16 X8.8 | length 72
  DIGITAL w0.5: C17.2 21.692,59.302 D3.16 ; D3.2 29.312,78.453 C15.1
  POWER w0.5: D3.16 D3.2 29.312,120.625 30.607,121.92 X8.8
VINB: CH_A.6 CH_B.6 X9.2 | length 46.2
  ANALOG w0.5: X9.2 132.664,88.265 CH_B.6 133.121,72.085 131.216,70.18 131.216,65.38 CH_A.6
VING: CH_A.4 CH_B.4 X9.6 | length 44.3
  ANALOG w0.5: X9.6 134.407,91.602 134.407,89.519 CH_B.4 134.407,87.011 134.407,64.729 CH_A.4
VINR: CH_A.2 CH_B.2 X9.18 | length 42.1
  ANALOG w0.5: CH_A.2 136.915,64.761 136.915,86.979 CH_B.2 139.344,88.265 141.097,90.018 141.097,92.558 139.319,94.336 X9.18
VOUTA: R14.1 X10.8 | length 10.6
  DIGITAL w0.254: X10.8 103.645,64.084 112.184,64.084 R14.1
VOUTB: R18.1 X10.28 | length 10.5
  DIGITAL w0.254: X10.28 103.594,89.433 R18.1@112.311,89.433
VOUTC: R6.1 X10.62 | length 9.6
  DIGITAL w0.254: R6.1 38.855,64.11 46.33,64.11 X10.62
VOUTD: R10.1 X10.42 | length 18
  DIGITAL w0.5: X10.42 50.757,91.206 R10.1
VSUB: C16.1 D3.4 R5.2 | length 8.3
  DIGITAL w0.5: R5.2 21.456,78.475 C16.1 21.47,76.904 D3.4
pads on no net: D1.6 D1.10 D1.11 D1.13 D1.14 D2.6 D2.13 D3.7 D3.8 D3.9 D3.12 D3.13 D3.14 D3.15 D3.17 D3.18 D3.19 D4.1 D4.8 D5.2 D5.3 D5.4 D5.15 D6.1 D6.8 D7.12 D7.13 D7.14 D7.15 D7.17 D7.18 D7.19 X3.1 X3.17 X3.18 X3.19 X3.35 X3.37 X4.1 X7.1 X10.2 X10.17 X10.36 X10.51

## Polygon pours and split planes (outlines as drawn)
GND on GROUND (split plane): 149.49,0.51 0.51,0.51 0.51,149.49 149.49,149.49

## Keep-outs
Keep-Out Layer:
  the board outline again, w0.254

## Other copper
DIGITAL:
  text "DUBNA_OBNINSK" at 96.622,140.741 h1.52
  text "KAI-02050" at 39.599,140.615 h1.52

## Silkscreen, mask and mechanical layers (free items; w line width, h text height)
Top Overlay:
  circle w0.254: c115.443,73.101 r0.477
  circle w0.254: c115.443,73.101 r0.262
  circle w0.254: c115.443,73.101 r0.036
  circle w0.254: c115.57,97.892 r0.477
  circle w0.254: c115.57,97.892 r0.262
  circle w0.254: c115.57,97.892 r0.036
  circle w0.254: c36.22,98.298 r0.477
  circle w0.254: c36.22,98.298 r0.262
  circle w0.254: c36.22,98.298 r0.036
  circle w0.254: c102.87,123.698 r0.477
  circle w0.254: c102.87,123.698 r0.262
  circle w0.254: c102.87,123.698 r0.036
  circle w0.254: c112.243,40.64 r0.477
  circle w0.254: c112.243,40.64 r0.262
  circle w0.254: c112.243,40.64 r0.036
  circle w0.254: c49.352,26.213 r0.477
  circle w0.254: c49.352,26.213 r0.262
  circle w0.254: c49.352,26.213 r0.036
  circle w0.254: c35.738,77.318 r0.036
  circle w0.254: c35.738,77.318 r0.262
  circle w0.254: c35.738,77.318 r0.477
  text "1" at 138.074,109.906 h1.52
  text "4" at 9.398,99.441 h1.52
  text "B" at 132.893,85.496 h1
  text "G" at 135.407,85.496 h1
  text "R" at 137.947,85.496 h1
  text "B" at 132.842,60.757 h1
  text "G" at 135.331,60.757 h1
  text "R" at 137.897,60.757 h1
  text "2" at 137.82,40.996 h1.52
  text "3" at 9.398,40.513 h1.52